# EAGLE board CAN-USB_adapter (EAGLE 6.4)
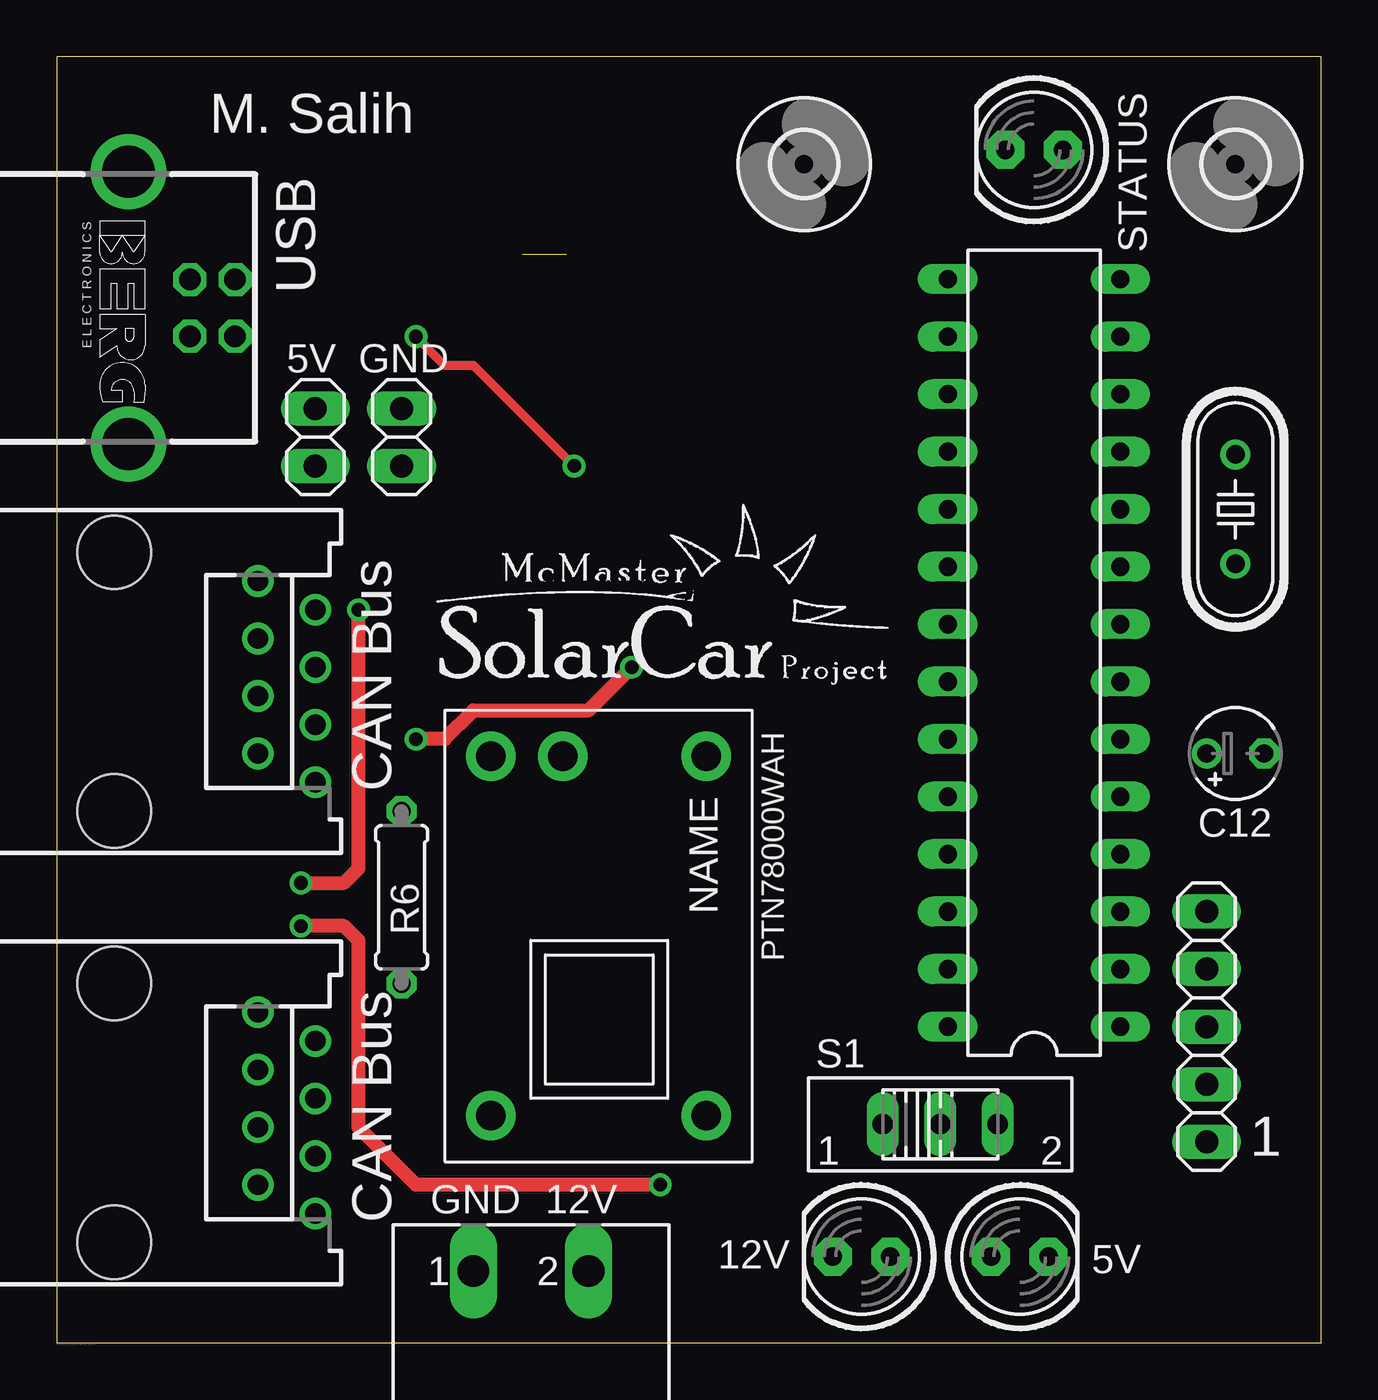
[diagram p0: board, top side]
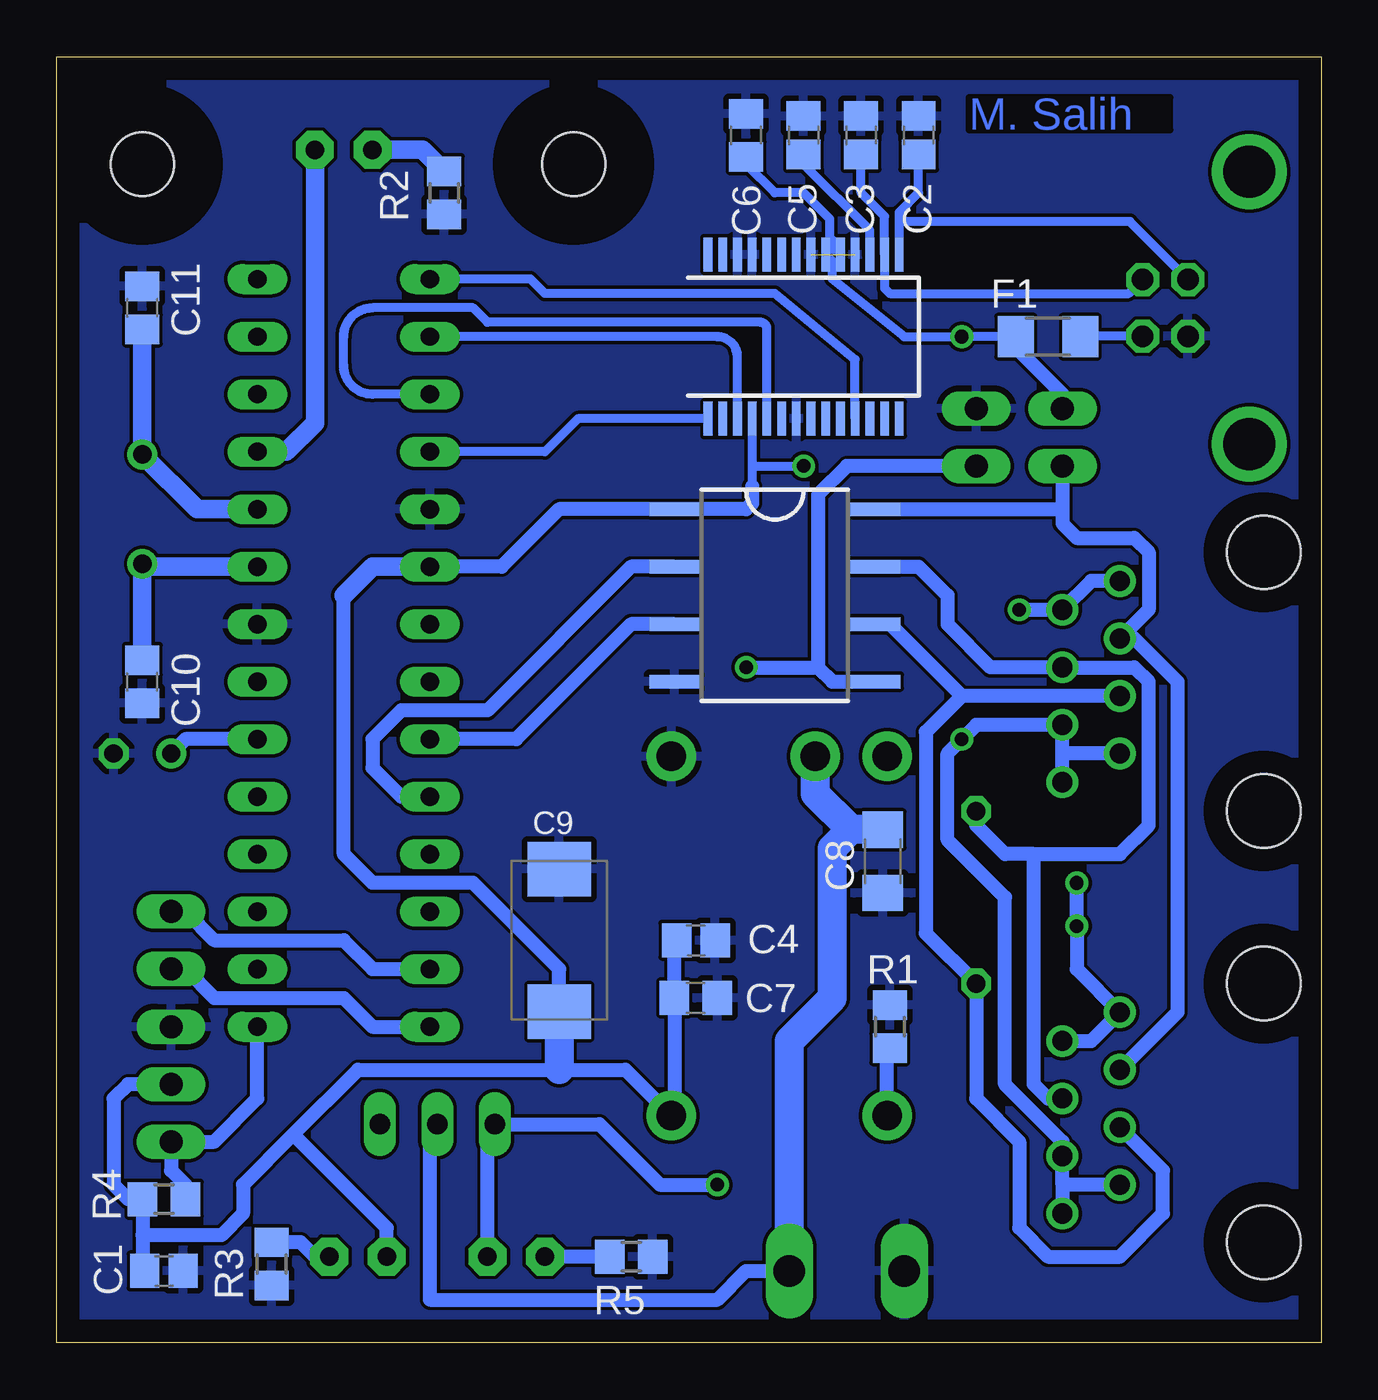
[diagram p1: board, bottom side, seen from below]

Size 55.86 x 56.82 mm. Coordinates in mm from the lower left corner, seen from the top.
Outline: 0,0 55.86,0 55.86,56.82 0,56.82 0,0
Copper layers (1*16): Top 0.035mm / dielectric 1.5mm / Bottom 0.035mm
Design rules "default": minimum track width 10mil, minimum drill 24mil, track to track 6mil, track to pad 6mil, pad to pad 6mil, via to via 6mil, smd to smd 6mil, copper to edge 40mil, drill to drill 8mil, minimum pad ring 10mil, minimum via ring 8mil, stop-mask expansion 4mil, vias tented up to drill 0mil, thermal gap 10mil

## Footprints (pad centres in the part's own frame; a part is rotated, then mirrored left to right if it is on the bottom)
LED5MM = drill 0.813 pad 1.676 octagon: A -1.27,0; K 1.27,0
C0805 = smd 1.3 x 1.5: 1 -0.85,0; 2 0.85,0
C0805' = smd 1.3 x 1.5: 1 -0.95,0; 2 0.95,0
C1206 = smd 1.6 x 1.8: 1 -1.4,0; 2 1.4,0
SMC_D = smd 2.4 x 2.8: + -3.15,0; - 3.15,0
TT2D4 = drill 0.813: + -1.27,0 | drill 0.813 octagon: - 1.27,0
F1206 = smd 1.6 x 1.803: 1 -1.422,0; 2 1.422,0
2,8 = hole 2.8: 0,0
SSOP28 = smd 0.381 x 1.499: 1 -4.225,-3.625; 2 -3.575,-3.625; 3 -2.925,-3.625; 4 -2.275,-3.625; 5 -1.625,-3.625; 6 -0.975,-3.625; 7 -0.325,-3.625; 8 0.325,-3.625; 9 0.975,-3.625; 10 1.625,-3.625; 11 2.275,-3.625; 12 2.925,-3.625; 13 3.575,-3.625; 14 4.225,-3.625; 15 4.225,3.625; 16 3.575,3.625; 17 2.925,3.625; 18 2.275,3.625; 19 1.625,3.625; 20 0.975,3.625; 21 0.325,3.625; 22 -0.325,3.625; 23 -0.975,3.625; 24 -1.625,3.625; 25 -2.275,3.625; 26 -2.925,3.625; 27 -3.575,3.625; 28 -4.225,3.625
DIL28/3 = drill 0.813 long: 1 -16.51,-3.81; 2 -13.97,-3.81; 3 -11.43,-3.81; 4 -8.89,-3.81; 5 -6.35,-3.81; 6 -3.81,-3.81; 7 -1.27,-3.81; 8 1.27,-3.81; 9 3.81,-3.81; 10 6.35,-3.81; 11 8.89,-3.81; 12 11.43,-3.81; 13 13.97,-3.81; 14 16.51,-3.81; 15 16.51,3.81; 16 13.97,3.81; 17 11.43,3.81; 18 8.89,3.81; 19 6.35,3.81; 20 3.81,3.81; 21 1.27,3.81; 22 -1.27,3.81; 23 -3.81,3.81; 24 -6.35,3.81; 25 -8.89,3.81; 26 -11.43,3.81; 27 -13.97,3.81; 28 -16.51,3.81
PTN78000 = drill 1.3 pad 2.184: P1 -8.128,4.572; P2 -8.128,-1.778; P3 -8.128,-4.953; P4 7.747,-4.953; P5 7.747,4.572
DUB-R-PDSO-G8 = smd 0.6 x 2.2: 1 -3.81,-4.445; 2 -1.27,-4.445; 3 1.27,-4.445; 4 3.81,-4.445; 5 3.81,4.445; 6 1.27,4.445; 7 -1.27,4.445; 8 -3.81,4.445
1X05 = drill 1.016 long: 1 -5.08,0; 2 -2.54,0; 3 0,0; 4 2.54,0; 5 5.08,0
215877-7 = drill 0.889: 1 -4.445,6.35; 2 -3.175,8.89; 3 -1.905,6.35; 4 -0.635,8.89; 5 0.635,6.35; 6 1.905,8.89; 7 3.175,6.35; 8 4.445,8.89 | hole 3.251: -5.715,0; 5.715,0
1X02 = drill 1.016 long: 1 -1.27,0; 2 1.27,0
MSTBA2 = drill 1.397 long: 1 -2.54,5.08; 2 2.54,5.08
HC49/S = drill 0.813: 1 -2.413,0; 2 2.413,0
R0805 = smd 1.3 x 1.5: 1 -0.95,0; 2 0.95,0
0207/7 = drill 0.813 octagon: 1 -3.81,0; 2 3.81,0
EG1218 = drill 0.9 long: 1 -2.54,0; 2 0,0; 3 2.54,0
PN61729-S = drill 0.95 octagon: 1 1.25,4.71; 2 -1.25,4.71; 3 -1.25,2.71; 4 1.25,2.71 | drill 2.3 pad 2.9: S1 -6.02,0; S2 6.02,0

## Placement (x,y rotation side)
5V  [LED5MM]  42.55,3.81 0 top
12V  [LED5MM]  35.56,3.81 180 top
C1  0.01u  [C0805]  51.12,3.17 0 bottom
C2  47p  [C0805]  17.78,53.34 90 bottom
C3  47p  [C0805]  20.32,53.34 90 bottom
C4  4.7u  [C0805]  27.62,17.78 0 bottom
C5  0.1u  [C0805]  22.86,53.34 90 bottom
C6  1u  [C0805']  25.4,53.34 90 bottom
C7  0.1u  [C0805']  27.62,15.24 180 bottom
C8  2.2u  [C1206]  19.37,21.27 270 bottom
C9  100u  [SMC_D]  33.66,17.78 90 bottom
C10  22p  [C0805']  52.07,29.21 270 bottom
C11  22p  [C0805']  52.07,45.72 90 bottom
C12  10u  [TT2D4]  52.07,26.04 0 top
F1  0.5  [F1206]  12.06,44.45 0 bottom
H2  MOUNT-HOLE2.8  [2,8]  52.07,52.07 0 top
H4  MOUNT-HOLE2.8  [2,8]  33.02,52.07 0 top
IC1  FT232RL  [SSOP28]  22.86,44.45 0 bottom
IC2  PIC18F26K80I/SP  [DIL28/3]  43.18,30.48 90 top
IC3  PTN78000WAH  [PTN78000]  24.13,17.78 270 top
IC4  ISO1050DUB  [DUB-R-PDSO-G8]  24.13,33.02 270 bottom
J1  ICD  [1X05]  50.8,13.97 90 top
J2  TELEM  [215877-7]  2.54,29.21 270 top
J3  TELEM  [215877-7]  2.54,10.16 270 top
JP1  [1X02]  15.24,40.01 270 top
JP2  [1X02]  11.43,40.01 270 top
POWER  MSTBA2  [MSTBA2]  20.95,-1.91 0 top
Q4  20M  [HC49/S]  52.07,36.83 90 top
R1  21k  [R0805]  19.05,13.97 270 bottom
R2  470  [R0805]  38.73,50.8 90 bottom
R3  470  [R0805]  46.35,3.49 90 bottom
R4  10k  [R0805]  51.12,6.35 180 bottom
R5  470  [R0805]  30.48,3.81 180 bottom
R6  120  [0207/7]  15.24,19.68 270 top
S1  SEG1218  [EG1218]  39.03,9.66 0 top
STATUS  [LED5MM]  43.18,52.7 180 top
X1  PN61729-S  [PN61729-S]  3.17,45.72 270 top

## Library data of the parts
5V 12V R6 STATUS = adafruit
C1-C5 = resistor
C6-C12 R1-R5 = rcl
F1 IC1 IC2 S1 = MSCP_2011_v2
H2 H4 = holes
IC3 = MSCP_2011_v1
IC4 = texas; MPN: ISO1050DUBR; OC_FARNELL: 1755712; OC_NEWARK: 14R9899
J1 JP1 JP2 = pinhead
J2 J3 = con-amp
POWER = con-phoenix-508; MF: FARNELL; MPN: 1757242; OC_FARNELL: 3705171; OC_NEWARK: 71C4161
Q4 = crystal; OC_FARNELL: 1667008; OC_NEWARK: unknown
X1 = con-berg; OC_FARNELL: unknown; OC_NEWARK: unknown

## Nets
+5V: 5V.A C1.1 C4.1 C6.1 C7.2 C9.+ F1.1 IC1.4 IC1.19 IC1.20 IC2.20 IC3.P5 IC4.1 J1.2 JP2.1 R4.2
+12V: C8.1 IC3.P2 POWER.2 S1.2
CTS: IC1.11 IC2.15
GND: C1.2 C2.2 C3.2 C4.2 C5.2 C6.2 C7.1 C8.2 C9.- C10.2 C11.2 C12.- IC1.7 IC1.18 IC1.21 IC1.25 IC1.26 IC2.8 IC2.19 IC3.P1 IC4.4 J1.3 JP1.1 POWER.1 R1.1 R2.1 R3.1 R5.1 X1.4
N$1: C3.1 IC1.16 X1.2
N$2: C2.1 IC1.15 X1.3
N$3: C5.1 IC1.17
N$4: IC2.28 J1.4
N$5: IC2.27 J1.5
N$6: IC2.24 IC4.2
N$7: F1.2 X1.1
N$8: IC3.P4 R1.2
N$9: IC2.23 IC4.3
N$10: R2.2 STATUS.K
N$11: C10.1 IC2.9 Q4.1
N$12: C11.1 IC2.10 Q4.2
N$13: IC2.11 STATUS.A
N$14: C12.+ IC2.6
N$15: 5V.K R3.2
N$16: 12V.A J2.1 J2.2 J3.1 J3.2 S1.1
N$17: 12V.K R5.2
N$18: IC4.8 J2.3 J3.3 JP2.2
N$20: IC2.1 J1.1 R4.1
N$21: IC4.5 J2.6 J2.7 J2.8 J3.6 J3.7 J3.8 JP1.2
N$26: IC4.7 J2.4 J3.4 R6.1
N$58: IC4.6 J2.5 J3.5 R6.2
RTS: IC1.3 IC2.16
RX: IC1.1 IC2.18
TX: IC1.5 IC2.17

## Tracks (layer width: path | path; a pad name or v marks a point on that pad's centre or on a via)
+5V  (via drill 0.6)
  Top 0.406: v22.86,38.73 18.41,43.18 17.14,43.18 v15.88,44.45
  Bottom 0.406: 21.38,48.58 21.59,48.26 21.42,48.26 IC1.19 | 21.38,48.58 IC1.20 21.59,47.78 21.59,46.99 18.41,44.45 v15.88,44.45 F1.1 | 21.38,48.58 21.7,48.78 21.7,49.64 22.86,50.8 24.13,50.8 25.4,52.07 C6.1 | 25.08,37.78 25.14,37.84 IC1.4 25.14,38.79 25.08,38.73 v22.86,38.73
  Bottom 0.61: IC2.20 36.2,34.29 33.66,36.83 IC4.1 25.4,36.83 25.14,37.09 25.14,37.84 | J1.2 52.7,11.43 53.34,10.79 53.34,6.99 52.7,6.35 R4.2 52.07,4.76 | 52.07,4.76 52.07,3.27 C1.1 | 45.4,9.21 47.62,6.99 47.62,5.71 48.58,4.76 52.07,4.76 | 45.4,9.21 42.55,12.06 33.66,12.06 30.73,12.06 IC3.P5 28.57,10.16 C7.2 28.57,17.68 C4.1 | C9.+ 33.66,16.51 37.47,20.32 41.91,20.32 43.18,21.59 43.18,33.02 | 5V.A 41.27,5.08 45.4,9.21 | JP2.1 11.43,41.91 13.34,43.81 13.34,44.3 F1.1
  Bottom 0.813: 43.18,33.02 41.91,34.29 IC2.20
  Bottom 1.27: C9.+ 33.66,12.06
+12V
  Bottom 0.61: POWER.2 25.4,3.17 26.67,1.91 39.37,1.91 39.37,9.32 S1.2
  Bottom 1.27: C8.1 20.77,22.67 | 20.77,22.67 22.35,24.26 IC3.P2 | POWER.2 23.5,13.34 21.59,15.24 21.59,21.85 20.77,22.67
CTS
  Bottom 0.406: IC1.11 20.59,43.45 24.13,46.35 34.29,46.35 34.92,46.99 IC2.15
GND  (1 unrouted)
  pour Bottom: 0,57.15 0,0 55.88,-0.64 55.88,56.52
N$1
  Bottom 0.406: C3.1 20.32,50.8 19.29,49.77 IC1.16 19.29,46.59 19.05,46.35 8.5,46.35 X1.2
N$2
  Bottom 0.406: IC1.15 18.64,49.53 | 18.64,49.53 18.64,49.95 17.78,50.8 C2.1 | 18.64,49.53 8.45,49.53 X1.3
N$3
  Bottom 0.406: IC1.17 19.93,49.15 22.86,52.07 C5.1
N$4
  Bottom 0.61: J1.4 50.16,16.51 48.9,15.24 43.18,15.24 41.91,13.97 IC2.28
N$5
  Bottom 0.61: J1.5 50.16,19.05 48.9,17.78 43.18,17.78 41.91,16.51 IC2.27
N$6
  Bottom 0.61: IC4.2 30.48,34.29 36.83,27.94 40.64,27.94 41.91,26.67 41.91,25.4 40.64,24.13 IC2.24
N$7
  Bottom 0.406: X1.1 10.62,44.47 F1.2
N$8
  Bottom 0.61: IC3.P4 19.18,12.89 R1.2
N$9
  Bottom 0.61: IC4.3 30.48,31.75 35.56,26.67 IC2.23
N$10
  Bottom 0.813: STATUS.K 39.69,52.7 R2.2
N$11
  Bottom 0.813: IC2.9 51.94,34.29 Q4.1 C10.1
N$12
  Bottom 0.813: IC2.10 49.66,36.83 Q4.2 C11.1
N$13
  Bottom 0.813: STATUS.A 44.45,40.64 45.72,39.37 IC2.11
N$14
  Bottom 0.61: IC2.6 50.16,26.67 C12.+
N$15
  Bottom 0.61: 5V.K 44.45,3.81 45.09,4.45 R3.2
N$16  (via drill 0.6)
  Top 0.61: v26.67,6.99 15.88,6.99 13.34,9.53 13.34,17.78 12.7,18.41 v10.79,18.41 | v10.79,20.32 12.7,20.32 13.34,20.95 v13.34,32.38
  Bottom 0.61: v26.67,6.99 29.21,6.99 31.88,9.66 S1.1 36.83,9.32 12V.A | J3.2 10.16,13.34 J3.1 10.79,16.51 v10.79,18.41 v10.79,20.32 | J2.1 10.16,33.66 J2.2 v13.34,32.38
N$17
  Bottom 0.61: R5.2 12V.K
N$18
  Bottom 0.61: J3.3 6.35,14.61 6.35,29.21 8.26,31.11 J2.3 7.62,32.38 7.62,34.92 8.26,35.56 10.79,35.56 11.43,36.2 11.43,36.83 | JP2.2 11.43,36.83 | IC4.8 11.43,36.83
N$20
  Bottom 0.61: IC2.1 46.99,10.79 48.9,8.89 J1.1 50.8,7.62 50.16,6.99 R4.1
N$21  (via drill 0.6)
  Top 0.61: v25.4,29.84 23.5,27.94 18.41,27.94 17.14,26.67 v15.88,26.67
  Bottom 0.61: JP1.2 20.95,38.73 22.23,37.47 22.23,29.84 | 22.23,29.84 21.59,29.21 IC4.5 | J2.7 11.43,26.04 | 11.43,26.04 J2.6 15.24,27.3 v15.88,26.67 16.51,26.04 16.51,22.23 13.97,19.68 13.97,11.43 11.43,8.89 J3.6 11.43,6.99 | J2.8 11.43,26.04 | v25.4,29.84 22.23,29.84 | J3.7 11.43,6.99 | 11.43,6.99 J3.8
N$26
  Bottom 0.61: 12.7,21.59 8.89,21.59 7.62,22.86 7.62,29.21 8.26,29.84 J2.4 14.61,29.84 16.51,31.75 16.51,33.02 17.78,34.29 IC4.7 | J3.4 12.06,10.79 12.7,11.43 12.7,21.59 | 12.7,21.59 13.97,21.59 15.24,22.86 R6.1
N$58
  Bottom 0.61: J2.5 15.88,28.57 | 15.88,28.57 19.05,31.75 IC4.6 | 15.88,28.57 17.46,26.99 17.46,18.1 R6.2 15.24,10.79 13.34,8.89 13.34,5.08 12.06,3.81 8.89,3.81 6.99,5.71 6.99,7.62 J3.5
RTS
  Bottom 0.406: IC1.3 25.79,43.56 arc-90 26.67,44.45 IC2.16
RX
  Bottom 0.406: IC1.1 32.84,40.83 34.29,39.37 IC2.18
TX
  Bottom 0.406: IC1.5 24.48,44.8 arc-90 24.77,45.09 36.83,45.09 37.47,45.72 41.91,45.72 arc-90 43.18,44.45 43.18,43.18 arc-90 41.91,41.91 IC2.17

## Text on the board
Bottom: M. Salih
tPlace: M. Salih | USB | 5V | GND | CAN Bus | PTN78000WAH | CAN Bus | 1 | GND | 12V | D:/Users/Solar Car/Pictures/logosquare copy.bmp